# EAGLE board PANELIZED (EAGLE 5.12)
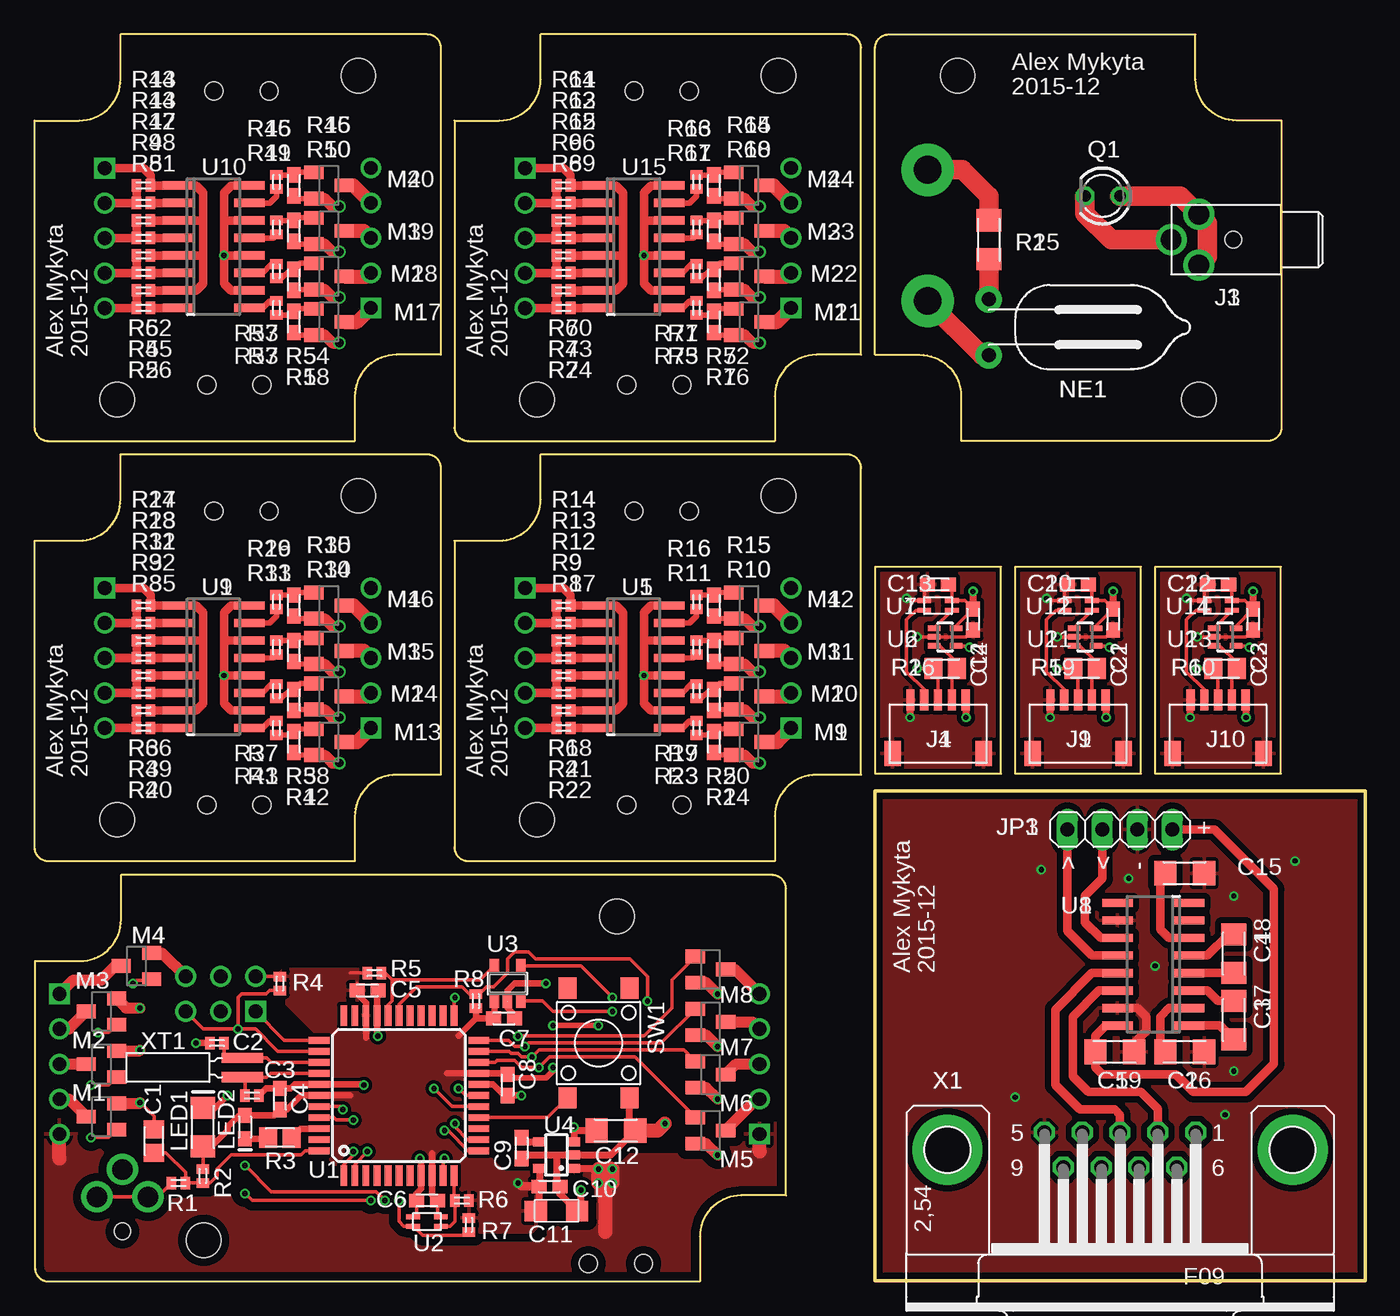
[diagram p0: board, top side]
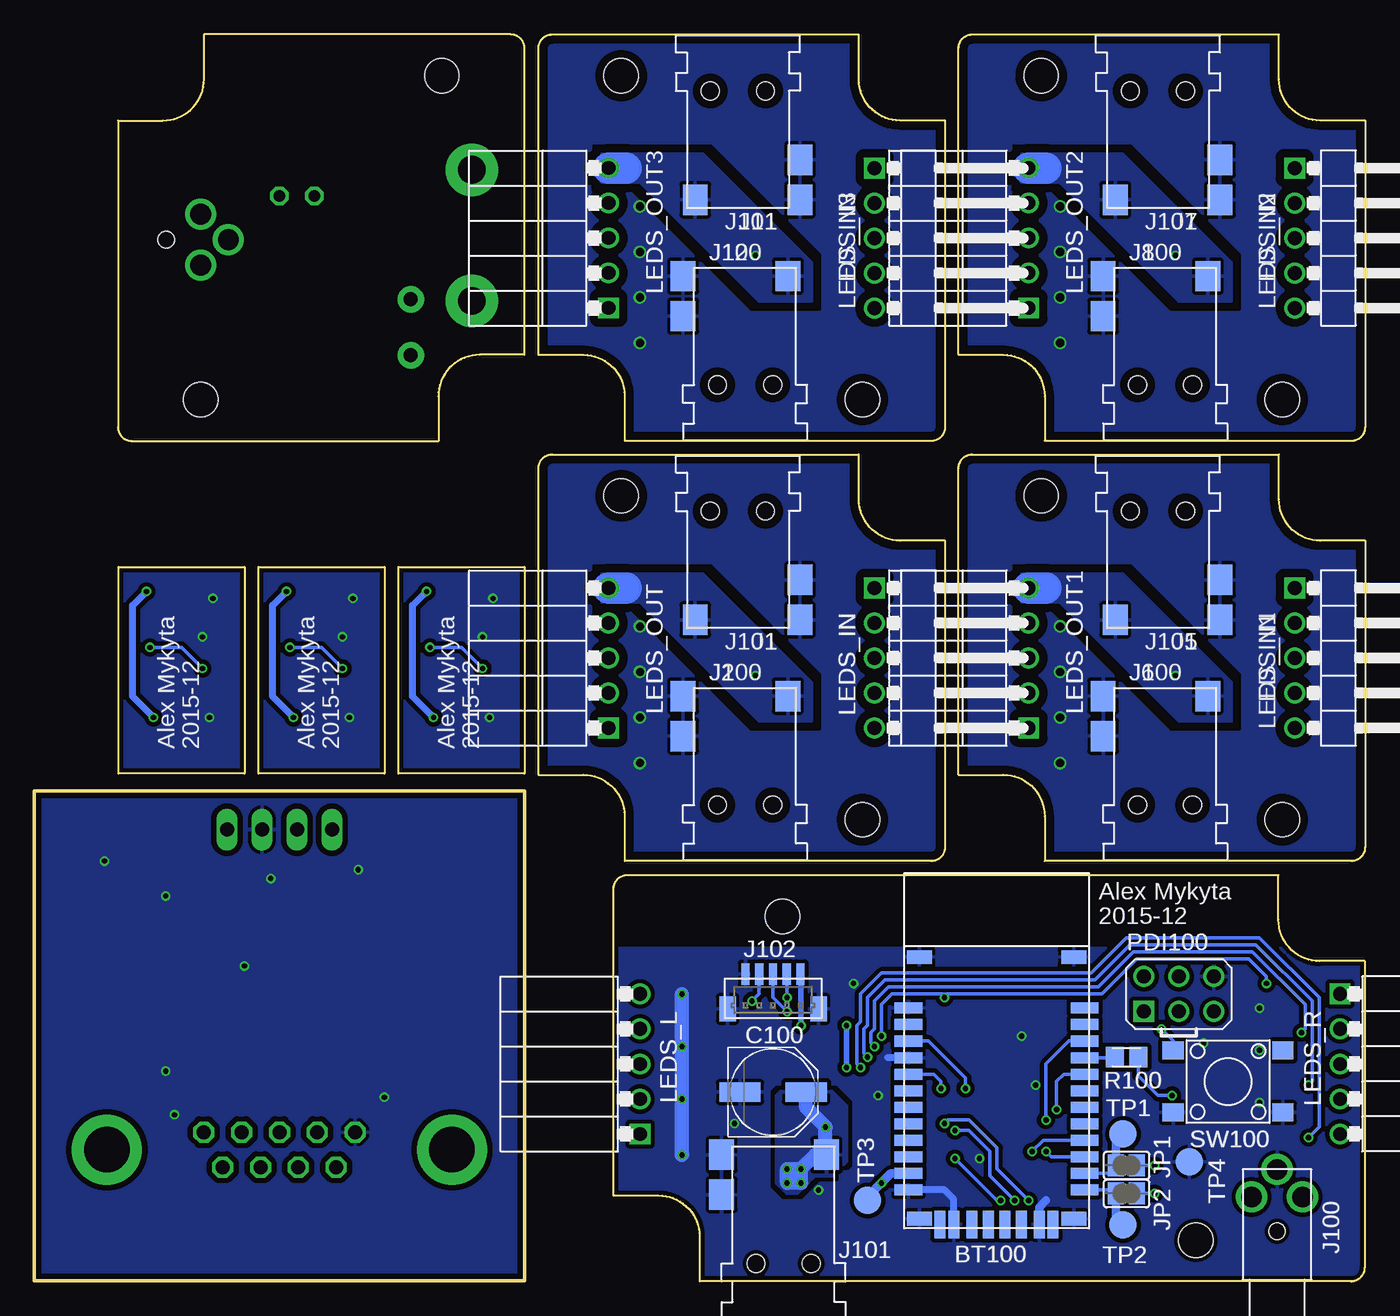
[diagram p1: board, bottom side, seen from below]

Size 96.56 x 90.5 mm. Coordinates in mm from the lower left corner, seen from the top.
Outline: 61,36.87 70.14,36.87 70.14,51.85 61,51.85 61,36.87
Outline: 61,35.6 96.56,35.6 96.56,0.04 61,0.04 61,35.6
Outline: 71.16,36.87 80.3,36.87 80.3,51.85 71.16,51.85 71.16,36.87
Outline: 81.32,36.87 90.46,36.87 90.46,51.85 81.32,51.85 81.32,36.87
Copper layers (1*16): Top 0.035mm / dielectric 1.5mm / Bottom 0.035mm
Design rules "MakerStudio": minimum track width 6mil, minimum drill 12mil, track to track 6mil, track to pad 6mil, pad to pad 6mil, via to via 6mil, smd to smd 0mil, copper to edge 10mil, drill to drill 10mil, minimum pad ring 10mil, minimum via ring 6mil, stop-mask expansion 2mil, vias tented up to drill 100mil, thermal gap 10mil

## Footprints (pad centres in the part's own frame; a part is rotated, then mirrored left to right if it is on the bottom)
RN42 = smd 2 x 0.8: 1 0.3,16; 2 0.3,14.8; 3 0.3,13.6; 4 0.3,12.4; 5 0.3,11.2; 6 0.3,10; 7 0.3,8.8; 8 0.3,7.6; 9 0.3,6.4; 10 0.3,5.2; 11 0.3,4; 12 0.3,2.8; 13 13.1,2.8; 14 13.1,4; 15 13.1,5.2; 16 13.1,6.4; 17 13.1,7.6; 18 13.1,8.8; 19 13.1,10; 20 13.1,11.2; 21 13.1,12.4; 22 13.1,13.6; 23 13.1,14.8; 24 13.1,16 | smd 0.8 x 2: 28 9.8,0.3; 29 3.6,0.3; 30 10.8,0.3; 31 8.5,0.3; 32 7.3,0.3; 33 6.1,0.3; 34 4.9,0.3; 35 2.6,0.3 | smd 1.8 x 1: S1 1.1,0.7; S2 12.3,0.7; S3 1.1,19.7; S4 12.3,19.7
0805 = smd 1.3 x 1.5: 1 -0.85,0; 2 0.85,0
0402 = smd 0.7 x 0.9: 1 -0.508,0; 2 0.508,0
0603 = smd 1.1 x 1: 1 -0.762,0; 2 0.762,0
KEMET-3216-18 = smd 1.6 x 1.5: + 1.5,0; - -1.5,0
1206 = smd 1.6 x 1.8: 1 -1.4,0; 2 1.4,0
PANASONIC_D = smd 3 x 1.4: + 2.4,0; - -2.4,0
PJ1-021-SMD = smd 2.2 x 1.8: 1 7.9,-2.6; 2 5,5; 3 7.9,5 | hole 1.3: 0,2.5; 0,-1.5
MJ1-2503A = drill 1.5 round: 1 2,0; 2 0,-1.85; 3 0,1.85 | hole 1.2: -2.5,0
JST_SR-5-RA = smd 0.6 x 1.55: 1 2,4.575; 2 1,4.575; 3 0,4.575; 4 -1,4.575; 5 -2,4.575 | smd 1.2 x 1.8: M1 3.3,0.7; M2 -3.3,0.7
JST_SR-5 = smd 0.6 x 1.55: 1 2,3.225; 2 1,3.225; 3 0,3.225; 4 -1,3.225; 5 -2,3.225 | smd 1.2 x 1.8: M1 3.3,0.7; M2 -3.3,0.7
SJ = smd 1.168 x 1.6: 1 -0.762,0; 2 0.762,0
1X04 = drill 1.016 long: 1 -3.81,0; 2 -1.27,0; 3 1.27,0; 4 3.81,0
1206' = smd 1.6 x 1.8: A -1.4,0; K 1.4,0
0603' = smd 1.1 x 1: A -0.85,0; K 0.85,0
1X05/90 = drill 1.016 square: 1 -5.08,-3.81 | drill 1.016 round: 2 -2.54,-3.81; 3 0,-3.81; 4 2.54,-3.81; 5 5.08,-3.81
1X05/90-F = drill 1 square: 1 -5.08,0 | drill 1 round: 2 -2.54,0; 3 0,0; 4 2.54,0; 5 5.08,0
SOT23 = smd 1 x 1.4: 1 -0.95,-1.1; 2 0.95,-1.1; 3 0,1.1
A1C = drill 1 pad 1.93 round: P$1 -2.032,-1.905; P$2 2.032,-1.905
2X03 = drill 1.016 square: 1 -2.54,-1.27 | drill 1.016 round: 2 -2.54,1.27; 3 0,-1.27; 4 0,1.27; 5 2.54,-1.27; 6 2.54,1.27
OPTO3MM = drill 0.813 octagon: C -1.27,0; E 1.27,0
TACT-6MM-SMT = smd 1.55 x 1.3: A1 -3.975,2.25; A2 3.975,2.25; B1 -3.975,-2.25; B2 3.975,-2.25
TP20R = smd 2 x 2: TP 0,0
TQFP44 = smd 1.5 x 0.5: 1 -5.8,4; 2 -5.8,3.2; 3 -5.8,2.4; 4 -5.8,1.6; 5 -5.8,0.8; 6 -5.8,0; 7 -5.8,-0.8; 8 -5.8,-1.6; 9 -5.8,-2.4; 10 -5.8,-3.2; 11 -5.8,-4; 23 5.8,-4; 24 5.8,-3.2; 25 5.8,-2.4; 26 5.8,-1.6; 27 5.8,-0.8; 28 5.8,0; 29 5.8,0.8; 30 5.8,1.6; 31 5.8,2.4; 32 5.8,3.2; 33 5.8,4 | smd 0.5 x 1.5: 12 -4,-5.8; 13 -3.2,-5.8; 14 -2.4,-5.8; 15 -1.6,-5.8; 16 -0.8,-5.8; 17 0,-5.8; 18 0.8,-5.8; 19 1.6,-5.8; 20 2.4,-5.8; 21 3.2,-5.8; 22 4,-5.8; 34 4,5.8; 35 3.2,5.8; 36 2.4,5.8; 37 1.6,5.8; 38 0.8,5.8; 39 0,5.8; 40 -0.8,5.8; 41 -1.6,5.8; 42 -2.4,5.8; 43 -3.2,5.8; 44 -4,5.8
VEML6040 = smd 1 x 0.35: 1 -1,0.35; 2 -1,-0.35; 3 1,-0.35; 4 1,0.35
SOT23-5 = smd 0.69 x 0.99: 1 -0.95,-1.29; 2 0,-1.29; 3 0.95,-1.29; 4 0.95,1.3; 5 -0.95,1.3
SSOP5-P-0.95 = smd 0.65 x 1: 1 -0.95,-1.2; 2 0,-1.2; 3 0.95,-1.2; 4 0.95,1.2; 5 -0.95,1.2
SOIC16N = smd 0.6 x 2.2: 1 -4.445,-2.6; 2 -3.175,-2.6; 3 -1.905,-2.6; 4 -0.635,-2.6; 5 0.635,-2.6; 6 1.905,-2.6; 7 3.175,-2.6; 8 4.445,-2.6; 9 4.445,2.6; 10 3.175,2.6; 11 1.905,2.6; 12 0.635,2.6; 13 -0.635,2.6; 14 -1.905,2.6; 15 -3.175,2.6; 16 -4.445,2.6
SOT353 = smd 0.4 x 0.9: 1 -0.65,-0.8; 2 0,-0.8; 3 0.65,-0.8; 4 0.65,0.8; 5 -0.65,0.8
1551NFL = hole 2.5: 6,26.5; 23.5,3
1551JFL = hole 2.5: 12.25,26.5; 42.25,3
F09HP = drill 1.016 octagon: 1 -5.486,-1.27; 2 -2.743,-1.27; 3 0,-1.27; 4 2.743,-1.27; 5 5.486,-1.27; 6 -4.115,1.27; 7 -1.372,1.27; 8 1.372,1.27; 9 4.115,1.27 | drill 3.302 pad 5.08 round: G1 -12.522,0; G2 12.522,0
2.1X6MM = smd 3 x 0.75: 1 5.4,0.7; 2 5.4,-0.7

## Placement (x,y rotation side)
BT100  RN42  [RN42]  33.44,3.85 0 bottom
C1  4.7u  [0805]  8.67,10.2 90 top
C2  10p  [0402]  13.24,17.31 180 top
C3  10p  [0402]  15.78,13.5 0 top
C4  0.1u  [0603]  17.82,13.24 90 top
C5  0.1u  [0603]  24.17,21.12 0 top
C6  0.1u  [0603]  28.48,5.88 180 top
C7  1u  [0603]  34.07,19.09 0 top
C8  0.1u  [0603]  34.33,14.26 270 top
C9  0.01u  [0603]  35.34,9.69 270 top
C10  0.1u  [0603]  37.37,6.89 0 top
C11  10u  [KEMET-3216-18]  37.88,5.12 180 top
C12  0.1u  [1206]  42.2,10.96 0 top
C13  0.1u  [0603]  65.57,50.58 180 top
C14  1u  [0603]  68.11,48.04 270 top
C15  0.1u  [1206]  83.47,29.63 0 top
C16  0.1u  [1206]  83.47,16.67 0 top
C17  0.1u  [1206]  87.03,18.96 90 top
C18  0.1u  [1206]  87.03,23.79 90 top
C19  0.1u  [1206]  78.39,16.67 0 top
C20  0.1u  [0603]  75.73,50.58 180 top
C21  1u  [0603]  78.27,48.04 270 top
C22  0.1u  [0603]  85.89,50.58 180 top
C23  1u  [0603]  88.43,48.04 270 top
C100  22u  [PANASONIC_D]  42.96,13.75 0 bottom
J1  EIAJ-03  [PJ1-021-SMD]  46.01,55.92 270 bottom
J2  EIAJ-03  [PJ1-021-SMD]  44.49,34.58 90 bottom
J3  MJ1-2503A  [MJ1-2503A]  84.49,75.6 180 top
J4  JST_SR-5-RA  [JST_SR-5-RA]  65.57,37.63 0 top
J5  EIAJ-03  [PJ1-021-SMD]  15.53,55.92 270 bottom
J6  EIAJ-03  [PJ1-021-SMD]  14.01,34.58 90 bottom
J7  EIAJ-03  [PJ1-021-SMD]  15.53,86.4 270 bottom
J8  EIAJ-03  [PJ1-021-SMD]  14.01,65.06 90 bottom
J9  JST_SR-5-RA  [JST_SR-5-RA]  75.73,37.63 0 top
J10  JST_SR-5-RA  [JST_SR-5-RA]  85.89,37.63 0 top
J11  EIAJ-03  [PJ1-021-SMD]  46.01,86.4 270 bottom
J12  EIAJ-03  [PJ1-021-SMD]  44.49,65.06 90 bottom
J100  MJ1-2503A  [MJ1-2503A]  6.39,6.13 90 bottom
J101  EIAJ-03  [PJ1-021-SMD]  41.69,1.31 90 bottom
J102  JST_SR-5  [JST_SR-5]  42.96,19.09 0 bottom
JP1  [SJ]  17.31,8.42 0 bottom
JP2  [SJ]  17.31,6.39 0 bottom
JP3  [1X04]  78.78,32.8 0 top
LED1  Green  [1206']  12.23,11.21 90 top
LED2  Red  [0603']  15.28,11.21 270 top
LEDS_IN  PINHD-1X5/90  [1X05/90]  31.79,45.25 270 bottom
LEDS_IN1  PINHD-1X5/90  [1X05/90]  1.31,45.25 270 bottom
LEDS_IN2  PINHD-1X5/90  [1X05/90]  1.31,75.73 270 bottom
LEDS_IN3  PINHD-1X5/90  [1X05/90]  31.79,75.73 270 bottom
LEDS_L  PINHD-1X5/90F  [1X05/90-F]  52.61,15.78 90 bottom
LEDS_OUT  PINHD-1X5/90F  [1X05/90-F]  54.9,45.25 90 bottom
LEDS_OUT1  PINHD-1X5/90F  [1X05/90-F]  24.42,45.25 90 bottom
LEDS_OUT2  PINHD-1X5/90F  [1X05/90-F]  24.42,75.73 90 bottom
LEDS_OUT3  PINHD-1X5/90F  [1X05/90-F]  54.9,75.73 90 bottom
LEDS_R  PINHD-1X5/90F  [1X05/90-F]  1.81,15.78 270 bottom
M1  FDN337N  [SOT23]  4.86,11.97 90 top
M2  FDN337N  [SOT23]  4.86,15.78 90 top
M3  FDN337N  [SOT23]  4.86,19.59 90 top
M4  FDN337N  [SOT23]  7.4,22.9 90 top
M5  FDN337N  [SOT23]  49.06,10.96 270 top
M6  FDN337N  [SOT23]  49.06,15.02 270 top
M7  FDN337N  [SOT23]  49.06,18.83 270 top
M8  FDN337N  [SOT23]  49.06,22.64 270 top
M9  FDN337N  [SOT23]  51.85,39.15 270 top
M10  FDN337N  [SOT23]  51.85,42.45 270 top
M11  FDN337N  [SOT23]  51.85,45.76 270 top
M12  FDN337N  [SOT23]  51.85,49.06 270 top
M13  FDN337N  [SOT23]  21.37,39.15 270 top
M14  FDN337N  [SOT23]  21.37,42.45 270 top
M15  FDN337N  [SOT23]  21.37,45.76 270 top
M16  FDN337N  [SOT23]  21.37,49.06 270 top
M17  FDN337N  [SOT23]  21.37,69.63 270 top
M18  FDN337N  [SOT23]  21.37,72.93 270 top
M19  FDN337N  [SOT23]  21.37,76.24 270 top
M20  FDN337N  [SOT23]  21.37,79.54 270 top
M21  FDN337N  [SOT23]  51.85,69.63 270 top
M22  FDN337N  [SOT23]  51.85,72.93 270 top
M23  FDN337N  [SOT23]  51.85,76.24 270 top
M24  FDN337N  [SOT23]  51.85,79.54 270 top
NE1  A1C  [A1C]  71.16,69.25 270 top
PDI100  ATMEL_PDI  [2X03]  13.5,20.86 0 bottom
Q1  TEPT4400  [OPTO3MM]  77.51,78.78 180 top
R1  1k  [0402]  10.45,7.15 180 top
R2  10k  [0402]  12.23,7.66 90 top
R3  330  [0805]  17.82,10.45 180 top
R4  10k  [0402]  17.82,21.63 90 top
R5  2.2k  [0402]  24.67,22.39 180 top
R6  2.2k  [0402]  31.02,5.88 0 top
R7  2.2k  [0402]  31.53,4.1 90 top
R8  2.2k  [0402]  32.04,20.36 270 top
R9  1k  [0402]  38.39,45.25 0 top
R10  4.7k  [0603]  49.31,45.76 90 top
R11  10k  [0402]  48.04,46.01 270 top
R12  10k  [0402]  38.39,46.52 0 top
R13  1k  [0402]  38.39,47.79 0 top
R14  10k  [0402]  38.39,49.06 0 top
R15  4.7k  [0603]  49.31,49.06 90 top
R16  10k  [0402]  48.04,49.31 270 top
R17  10k  [0402]  38.39,43.98 0 top
R18  1k  [0402]  38.39,42.71 0 top
R19  10k  [0402]  48.04,42.84 90 top
R20  4.7k  [0603]  49.31,42.2 90 top
R21  10k  [0402]  38.39,41.44 0 top
R22  1k  [0402]  38.39,40.17 0 top
R23  10k  [0402]  48.04,40.17 90 top
R24  4.7k  [0603]  49.31,39.15 90 top
R25  47k  [1206]  69.25,75.6 270 top
R26  100  [0805]  66.08,44.49 0 top
R27  10k  [0402]  7.91,49.06 0 top
R28  1k  [0402]  7.91,47.79 0 top
R29  10k  [0402]  17.56,49.31 270 top
R30  4.7k  [0603]  18.83,49.06 90 top
R31  10k  [0402]  7.91,46.52 0 top
R32  1k  [0402]  7.91,45.25 0 top
R33  10k  [0402]  17.56,46.01 270 top
R34  4.7k  [0603]  18.83,45.76 90 top
R35  10k  [0402]  7.91,43.98 0 top
R36  1k  [0402]  7.91,42.71 0 top
R37  10k  [0402]  17.56,42.84 90 top
R38  4.7k  [0603]  18.83,42.2 90 top
R39  10k  [0402]  7.91,41.44 0 top
R40  1k  [0402]  7.91,40.17 0 top
R41  10k  [0402]  17.56,40.17 90 top
R42  4.7k  [0603]  18.83,39.15 90 top
R43  10k  [0402]  7.91,79.54 0 top
R44  1k  [0402]  7.91,78.27 0 top
R45  10k  [0402]  17.56,79.79 270 top
R46  4.7k  [0603]  18.83,79.54 90 top
R47  10k  [0402]  7.91,77 0 top
R48  1k  [0402]  7.91,75.73 0 top
R49  10k  [0402]  17.56,76.49 270 top
R50  4.7k  [0603]  18.83,76.24 90 top
R51  10k  [0402]  7.91,74.46 0 top
R52  1k  [0402]  7.91,73.19 0 top
R53  10k  [0402]  17.56,73.31 90 top
R54  4.7k  [0603]  18.83,72.68 90 top
R55  10k  [0402]  7.91,71.92 0 top
R56  1k  [0402]  7.91,70.65 0 top
R57  10k  [0402]  17.56,70.65 90 top
R58  4.7k  [0603]  18.83,69.63 90 top
R59  100  [0805]  76.24,44.49 0 top
R60  100  [0805]  86.4,44.49 0 top
R61  10k  [0402]  38.39,79.54 0 top
R62  1k  [0402]  38.39,78.27 0 top
R63  10k  [0402]  48.04,79.79 270 top
R64  4.7k  [0603]  49.31,79.54 90 top
R65  10k  [0402]  38.39,77 0 top
R66  1k  [0402]  38.39,75.73 0 top
R67  10k  [0402]  48.04,76.49 270 top
R68  4.7k  [0603]  49.31,76.24 90 top
R69  10k  [0402]  38.39,74.46 0 top
R70  1k  [0402]  38.39,73.19 0 top
R71  10k  [0402]  48.04,73.31 90 top
R72  4.7k  [0603]  49.31,72.68 90 top
R73  10k  [0402]  38.39,71.92 0 top
R74  1k  [0402]  38.39,70.65 0 top
R75  10k  [0402]  48.04,70.65 90 top
R76  4.7k  [0603]  49.31,69.63 90 top
R100  330  [0805]  17.31,16.29 0 bottom
SW1  TACTILE-6MM-SMT  [TACT-6MM-SMT]  40.93,17.31 270 top
SW100  TACTILE-6MM-SMT  [TACT-6MM-SMT]  9.94,14.51 180 bottom
TP1  TPTP20R  [TP20R]  17.56,10.7 0 bottom
TP2  TPTP20R  [TP20R]  17.56,4.1 0 bottom
TP3  TPTP20R  [TP20R]  36.1,5.88 0 bottom
TP4  TPTP20R  [TP20R]  12.74,8.67 0 bottom
U1  ATXMEGA128D4  [TQFP44]  26.45,13.5 90 top
U2  VEML6040  [VEML6040]  28.48,4.35 0 top
U3  FIN1001M5  [SOT23-5]  34.33,21.63 0 top
U4  TAR5SB33  [SSOP5-P-0.95]  37.88,9.18 90 top
U5  TLP293-4  [SOIC16N]  43.47,44.61 270 top
U6  NCX2200GW  [SOT353]  66.08,46.77 270 top
U7  VEML6040  [VEML6040]  65.57,49.06 0 top
U8  MAX3232ECD  [SOIC16N]  81.19,23.02 90 top
U9  TLP293-4  [SOIC16N]  12.99,44.61 270 top
U10  TLP293-4  [SOIC16N]  12.99,75.09 270 top
U11  NCX2200GW  [SOT353]  76.24,46.77 270 top
U12  VEML6040  [VEML6040]  75.73,49.06 0 top
U13  NCX2200GW  [SOT353]  86.4,46.77 270 top
U14  VEML6040  [VEML6040]  85.89,49.06 0 top
U15  TLP293-4  [SOIC16N]  43.47,75.09 270 top
U$1  [1551NFL]  61,61 0 top
U$2  [1551NFL]  29.5,30.52 0 bottom
U$3  [1551NFL]  29.5,61 0 bottom
U$4  [1551NFL]  59.98,61 0 bottom
U$12  [1551NFL]  59.98,30.52 0 bottom
U$100  [1551JFL]  0.04,29.5 180 bottom
X1  [F09HP]  78.78,9.56 180 top
XT1  32.768k  [2.1X6MM]  9.69,15.53 0 top

## Library data of the parts
BT100 = aim-rf
C1-C23 C100 JP1 JP2 R1-R76 R100 = aim-passives
J1-J12 J100-J102 = aim-connectors
JP3 LEDS_IN LEDS_IN1-LEDS_IN3 LEDS_L LEDS_OUT LEDS_OUT1-LEDS_OUT3 LEDS_R = aim-headers
LED1 LED2 = aim-diodes
M1-M24 Q1 U5 U9 U10 U15 = aim-transistor
NE1 = aim-lamp
PDI100 U1 = aim-atmel
SW1 SW100 = aim-switch
TP1-TP4 = testpad
U2 U7 U12 U14 = aim-sensors
U3 U8 = aim-digital
U4 = aim-power; VOLT: 3.3
U6 U11 U13 = aim-analog
U$1-U$4 U$12 U$100 = hammond_enclosures
X1 = con-subd; OC_FARNELL: unknown; OC_NEWARK: unknown
XT1 = aim-crystals

## Nets
3V1: C13.1 C14.1 J4.1 U6.5 U7.4
3V2: C19.1 JP3.4 U8.16
3V3: BT100.11 C4.1 C5.1 C6.1 C7.1 C8.1 C10.1 C11.+ J102.1 LED1.A LED2.A PDI100.2 R2.2 R4.2 R5.2 R6.2 R7.2 R8.2 TP3.TP U1.9 U1.19 U1.31 U1.39 U2.4 U3.1 U4.5
3V4: C20.1 C21.1 J9.1 U11.5 U12.4
3V5: C22.1 C23.1 J10.1 U13.5 U14.4
12V: C12.1 C100.+ J101.1 LEDS_L.1 LEDS_R.5 U4.1 U4.3
12V1: J1.1 J2.1 LEDS_OUT.5 U5.10 U5.12 U5.14 U5.16
12V2: J5.1 J6.1 LEDS_OUT1.5 U9.10 U9.12 U9.14 U9.16
12V3: J7.1 J8.1 LEDS_OUT2.5 U10.10 U10.12 U10.14 U10.16
12V4: J11.1 J12.1 LEDS_OUT3.5 U15.10 U15.12 U15.14 U15.16
12V_IN: LEDS_IN.1 R12.2 R14.2 R17.2 R21.2 U5.1 U5.3 U5.5 U5.7
12V_IN1: LEDS_IN1.1 R27.2 R31.2 R35.2 R39.2 U9.1 U9.3 U9.5 U9.7
12V_IN2: LEDS_IN2.1 R43.2 R47.2 R51.2 R55.2 U10.1 U10.3 U10.5 U10.7
12V_IN3: LEDS_IN3.1 R61.2 R65.2 R69.2 R73.2 U15.1 U15.3 U15.5 U15.7
B_IN: LEDS_IN.4 R17.1 R18.1
B_IN1: LEDS_IN1.4 R35.1 R36.1
B_IN2: LEDS_IN2.4 R51.1 R52.1
B_IN3: LEDS_IN3.4 R69.1 R70.1
BT_!RESET: BT100.5 U1.17
BT_CTS: BT100.15 U1.1
BT_GPIO3: BT100.20 U1.40
BT_GPIO4: BT100.22 U1.41
BT_GPIO6: BT100.3 U1.16
BT_MCU_RX: JP1.2 U1.12
BT_MCU_TX: JP2.2 U1.13
BT_RTS: BT100.16 U1.2
BT_RX: BT100.14 JP1.1 TP1.TP
BT_TX: BT100.13 JP2.1 TP2.TP
G_IN: LEDS_IN.3 R9.1 R12.1
G_IN1: LEDS_IN1.3 R31.1 R32.1
G_IN2: LEDS_IN2.3 R47.1 R48.1
G_IN3: LEDS_IN3.3 R65.1 R66.1
GND: BT100.1 BT100.4 BT100.12 BT100.28 BT100.29 BT100.S1 BT100.S2 BT100.S3 BT100.S4 C1.2 C2.2 C3.2 C4.2 C5.2 C6.2 C7.2 C8.2 C9.2 C10.2 C11.- C12.2 C100.- J100.1 J101.2 J101.3 J102.5 J102.M1 J102.M2 M1.2 M2.2 M3.2 M4.2 M5.2 M6.2 M7.2 M8.2 PDI100.6 SW1.A2 SW100.A1 SW100.A2 TP4.TP U1.8 U1.18 U1.30 U1.38 U2.1 U3.2 U4.2
GND1: J1.2 J1.3 J2.2 J2.3 M9.2 M10.2 M11.2 M12.2 R10.1 R15.1 R20.1 R24.1
GND2: J3.1 Q1.E
GND3: C13.2 C14.2 J4.5 J4.M1 J4.M2 U6.2 U7.1
GND4: C15.2 C16.2 C19.2 JP3.3 U8.10 U8.15 X1.5
GND5: J5.2 J5.3 J6.2 J6.3 M13.2 M14.2 M15.2 M16.2 R30.1 R34.1 R38.1 R42.1
GND6: J7.2 J7.3 J8.2 J8.3 M17.2 M18.2 M19.2 M20.2 R46.1 R50.1 R54.1 R58.1
GND7: C20.2 C21.2 J9.5 J9.M1 J9.M2 U11.2 U12.1
GND8: C22.2 C23.2 J10.5 J10.M1 J10.M2 U13.2 U14.1
GND9: J11.2 J11.3 J12.2 J12.3 M21.2 M22.2 M23.2 M24.2 R64.1 R68.1 R72.1 R76.1
I2C0_SCL: R6.1 U1.11 U2.3
I2C0_SDA: R7.1 U1.10 U2.2
I2C1_SCL: R5.1 U1.29 U3.5
I2C1_SDA: J102.4 R8.1 U1.28
N$1: LEDS_OUT.1 M9.3
N$2: LEDS_L.5 M8.3
N$3: LEDS_L.4 M7.3
N$4: LEDS_L.3 M6.3
N$5: LEDS_L.2 M5.3
N$6: LEDS_OUT.2 M10.3
N$7: BT100.21 R100.1
N$8: LED1.K R100.2
N$9: LED2.K R3.2
N$10: C9.1 U4.4
N$11: J100.2 J100.3 R1.2
N$12: PDI100.1 U1.34
N$13: PDI100.5 R4.1 SW100.B2 U1.35
N$14: C3.1 U1.37 XT1.2
N$15: C2.1 U1.36 XT1.1
N$16: LEDS_R.1 M4.3
N$17: LEDS_R.2 M3.3
N$18: LEDS_R.3 M2.3
N$19: LEDS_R.4 M1.3
N$20: SW1.B2 U1.15
N$21: LEDS_OUT.3 M11.3
N$22: LEDS_OUT.4 M12.3
N$23: R13.2 U5.2
N$24: R16.2 U5.15
N$25: R9.2 U5.4
N$26: R11.2 U5.13
N$27: R18.2 U5.6
N$28: R19.2 U5.11
N$29: R22.2 U5.8
N$30: R23.2 U5.9
N$31: J3.2 J3.3 Q1.C
N$32: NE1.P$1 R25.2
N$33: C17.2 U8.3
N$34: C17.1 U8.1
N$35: C18.1 U8.4
N$36: C18.2 U8.5
N$37: C15.1 U8.6
N$38: C16.1 U8.2
N$39: LEDS_OUT1.1 M13.3
N$40: LEDS_OUT1.2 M14.3
N$41: LEDS_OUT1.3 M15.3
N$42: LEDS_OUT1.4 M16.3
N$43: R28.2 U9.2
N$44: R29.2 U9.15
N$45: R32.2 U9.4
N$46: R33.2 U9.13
N$47: R36.2 U9.6
N$48: R37.2 U9.11
N$49: R40.2 U9.8
N$50: R41.2 U9.9
N$51: LEDS_OUT2.1 M17.3
N$52: LEDS_OUT2.2 M18.3
N$53: LEDS_OUT2.3 M19.3
N$54: LEDS_OUT2.4 M20.3
N$55: R44.2 U10.2
N$56: R45.2 U10.15
N$57: R48.2 U10.4
N$58: R49.2 U10.13
N$59: R52.2 U10.6
N$60: R53.2 U10.11
N$61: R56.2 U10.8
N$62: R57.2 U10.9
N$63: LEDS_OUT3.1 M21.3
N$64: LEDS_OUT3.2 M22.3
N$65: LEDS_OUT3.3 M23.3
N$66: LEDS_OUT3.4 M24.3
N$67: R62.2 U15.2
N$68: R63.2 U15.15
N$69: R66.2 U15.4
N$70: R67.2 U15.13
N$71: R70.2 U15.6
N$72: R71.2 U15.11
N$73: R74.2 U15.8
N$74: R75.2 U15.9
PWM_B: M3.1 M7.1 U1.22
PWM_B1: M10.1 R19.1 R20.2
PWM_B2: M14.1 R37.1 R38.2
PWM_B3: M18.1 R53.1 R54.2
PWM_B4: M22.1 R71.1 R72.2
PWM_G: M2.1 M6.1 U1.21
PWM_G1: M11.1 R10.2 R11.1
PWM_G2: M15.1 R33.1 R34.2
PWM_G3: M19.1 R49.1 R50.2
PWM_G4: M23.1 R67.1 R68.2
PWM_R: M1.1 M5.1 U1.20
PWM_R1: M12.1 R15.2 R16.1
PWM_R2: M16.1 R29.1 R30.2
PWM_R3: M20.1 R45.1 R46.2
PWM_R4: M24.1 R63.1 R64.2
PWM_W: M4.1 M8.1 U1.23
PWM_W1: M9.1 R23.1 R24.2
PWM_W2: M13.1 R41.1 R42.2
PWM_W3: M17.1 R57.1 R58.2
PWM_W4: M21.1 R75.1 R76.2
PWR_SENSE: C1.1 R1.1 R2.1 U1.44
R_IN: LEDS_IN.2 R13.1 R14.1
R_IN1: LEDS_IN1.2 R27.1 R28.1
R_IN2: LEDS_IN2.2 R43.1 R44.1
R_IN3: LEDS_IN3.2 R61.1 R62.1
RED_LED: R3.1 U1.42
RS232_RX: U8.13 X1.3
RS232_TX: U8.14 X1.2
SCL: U6.1 U7.3
SCL1: U11.1 U12.3
SCL2: U13.1 U14.3
SCL_N: J102.3 U3.3
SCL_N1: J4.3 R26.1 U6.4
SCL_N2: J9.3 R59.1 U11.4
SCL_N3: J10.3 R60.1 U13.4
SCL_P: J102.2 U3.4
SCL_P1: J4.2 R26.2 U6.3
SCL_P2: J9.2 R59.2 U11.3
SCL_P3: J10.2 R60.2 U13.3
SDA: J4.4 U7.2
SDA1: J9.4 U12.2
SDA2: J10.4 U14.2
TTL_RX: JP3.1 U8.12
TTL_TX: JP3.2 U8.11
VAC_H: NE1.P$2
VAC_N: R25.1
W_IN: LEDS_IN.5 R21.1 R22.1
W_IN1: LEDS_IN1.5 R39.1 R40.1
W_IN2: LEDS_IN2.5 R55.1 R56.1
W_IN3: LEDS_IN3.5 R73.1 R74.1

## Tracks (layer width: path | path; a pad name or v marks a point on that pad's centre or on a via)
3V1  (via drill 0.38)
  Top 0.254: C13.1 66.57,50.34 U7.4 67.5,49.41 C14.1 66.88,47.57 U6.5 | J4.1 67.6,42.17
  Top 0.508: v68.11,50.07 C14.1 | 67.6,42.17 v67.6,40.93
  Bottom 0.508: v67.6,40.93 69.12,42.45 69.12,49.06 v68.11,50.07
3V2
  Top 0.61: U8.16 77.76,18.58 77,17.81 C19.1 77,15.53 77.51,15.02 82.84,15.02 84.11,13.75 87.92,13.75 89.95,15.78 89.95,28.48 85.63,32.8 JP3.4
3V3  (via drill 0.38)
  Top 0.254: PDI100.2 R4.2 | LED1.A R2.2 | 15.19,11.97 LED2.A | C6.1 29.25,4.94 U2.4 | C5.1 23.4,21.63 | R5.2 22.9,22.39
  Top 0.406: v37.63,18.58 v40.93,18.58 | v37.63,15.53 37.63,15.28 37.12,14.77 34.58,14.77 C8.1
  Top 0.457: C5.1 23.4,20.86 24.05,20.22 U1.31 24.05,17.68 | 22.9,13.5 U1.39 19.34,13.5 18.32,12.48 C4.1 17.4,12.06 LED2.A | 29.93,15.1 U1.19 34.25,15.1 C8.1 | 28.85,9.32 U1.9 28.85,6.27 C6.1 | LED1.A 12.86,9.81 14.01,10.96 14.01,11.21 14.77,11.97 15.19,11.97 | R8.2 32.04,19.09 | 32.04,19.09 30.77,17.82 | U3.1 33.38,19.15 C7.1 32.04,19.09
  Top 0.508: U4.5 36.68,6.96 C10.1 36.61,5.35 C11.+
  Top 0.61: v35.09,7.15 35.34,6.89 C10.1
  Bottom 0.254: 40.93,22.28 J102.1
  Bottom 0.406: v37.63,15.53 v37.63,18.58 | v40.93,18.58 40.93,22.28
  Bottom 0.61: BT100.11 34.39,7.85 v35.09,7.15 36.1,6.13 TP3.TP
  pour Top (isolate 0.254): 20.86,17.56 18.32,20.1 18.32,21.37 17.82,21.88 17.82,22.39 18.07,22.64 23.91,22.64 23.91,20.36 25.18,19.09 29.75,19.09 32.04,16.8 32.04,9.94 34.07,7.91 36.61,7.91 36.61,4.1 36.1,3.59 31.53,3.59 30.52,4.61 30.52,7.91 22.39,7.91 20.86,9.43
3V4  (via drill 0.38)
  Top 0.254: C20.1 76.73,50.34 U12.4 77.66,49.41 C21.1 77.04,47.57 U11.5 | J9.1 77.76,42.17
  Top 0.508: v78.27,50.07 C21.1 | 77.76,42.17 v77.76,40.93
  Bottom 0.508: v77.76,40.93 79.28,42.45 79.28,49.06 v78.27,50.07
3V5  (via drill 0.38)
  Top 0.254: C22.1 86.89,50.34 U14.4 87.82,49.41 C23.1 87.2,47.57 U13.5 | J10.1 87.92,42.17
  Top 0.508: v88.43,50.07 C23.1 | 87.92,42.17 v87.92,40.93
  Bottom 0.508: v87.92,40.93 89.44,42.45 89.44,49.06 v88.43,50.07
12V  (via drill 0.38)
  Top 0.254: 39.15,10.2 U4.3 | 39.15,8.16 U4.1 | 41.44,7.15 v40.93,7.15
  Top 0.508: C12.1 39.41,10.96 v39.15,11.21 39.15,10.2 | v40.93,8.16 39.15,8.16
  Top 1.016: v40.93,7.15 v40.93,8.16 v41.95,8.16 v41.95,7.15 41.44,7.15 41.44,3.59 | 52.61,9.43 LEDS_L.1 | 1.81,8.93 LEDS_R.5
  Bottom 0.254: J101.1 39.15,9.27
  Bottom 1.016: C100.+ 40.56,12.62 v39.15,11.21 39.15,9.27 | J101.1 39.89,9.21 v40.93,8.16 | v40.93,8.16 v41.95,8.16 v41.95,7.15 v40.93,7.15 v40.93,8.16
  pour Top (isolate 0.61, rank 2): 1.05,11.72 0.04,10.7 0.04,0.04 54.65,0.04 54.65,11.47 51.85,11.47 49.57,9.18 39.15,9.18 39.15,7.66 40.17,6.64 40.17,6.13 37.63,3.59 27.98,3.59 25.44,6.13 8.16,6.13 2.58,11.72
  pour Bottom (isolate 0.457): 39.15,14.26 37.63,12.74 37.63,8.67 38.64,7.66 39.91,7.66 41.18,6.39 41.95,6.39 42.71,7.15 42.71,13.5 41.95,14.26
12V1  (via drill 0.38)
  Top 0.61: U5.10 44.74,41.44 44.23,41.95 v44.23,43.98 | v44.23,43.98 U5.12 | v44.23,43.98 44.23,46.52 | 44.23,46.52 U5.14 | 44.23,46.52 44.23,48.55 44.74,49.06 U5.16
  Bottom 2.286: LEDS_OUT.5 53.63,50.33
  pour Bottom: 40.17,40.68 40.17,43.47 48.04,51.34 55.41,51.34 55.92,50.84 55.92,49.82 55.41,49.31 52.61,49.31 43.98,40.68
12V2  (via drill 0.38)
  Top 0.61: U9.10 14.26,41.44 13.75,41.95 v13.75,43.98 | v13.75,43.98 U9.12 | v13.75,43.98 13.75,46.52 | 13.75,46.52 U9.14 | 13.75,46.52 13.75,48.55 14.26,49.06 U9.16
  Bottom 2.286: LEDS_OUT1.5 23.15,50.33
  pour Bottom: 9.69,40.68 9.69,43.47 17.56,51.34 24.93,51.34 25.44,50.84 25.44,49.82 24.93,49.31 22.13,49.31 13.5,40.68
12V3  (via drill 0.38)
  Top 0.61: U10.10 14.26,71.92 13.75,72.43 v13.75,74.46 | v13.75,74.46 U10.12 | v13.75,74.46 13.75,77 | 13.75,77 U10.14 | 13.75,77 13.75,79.03 14.26,79.54 U10.16
  Bottom 2.286: LEDS_OUT2.5 23.15,80.81
  pour Bottom: 9.69,71.16 9.69,73.95 17.56,81.82 24.93,81.82 25.44,81.32 25.44,80.3 24.93,79.79 22.13,79.79 13.5,71.16
12V4  (via drill 0.38)
  Top 0.61: U15.10 44.74,71.92 44.23,72.43 v44.23,74.46 | v44.23,74.46 U15.12 | v44.23,74.46 44.23,77 | 44.23,77 U15.14 | 44.23,77 44.23,79.03 44.74,79.54 U15.16
  Bottom 2.286: LEDS_OUT3.5 53.63,80.81
  pour Bottom: 40.17,71.16 40.17,73.95 48.04,81.82 55.41,81.82 55.92,81.32 55.92,80.3 55.41,79.79 52.61,79.79 43.98,71.16
12V_IN
  Top 0.61: R12.2 U5.3 42.71,46.52 | R21.2 U5.7 42.2,41.44 42.71,41.95 42.71,43.98 | 42.71,43.98 42.71,46.52 | 42.71,43.98 U5.5 R17.2 | 42.71,46.52 42.71,48.55 42.2,49.06 U5.1 R14.2 38.9,49.82 38.39,50.33 LEDS_IN.1
12V_IN1
  Top 0.61: R31.2 U9.3 12.23,46.52 | R39.2 U9.7 11.72,41.44 12.23,41.95 12.23,43.98 | 12.23,43.98 12.23,46.52 | 12.23,43.98 U9.5 R35.2 | 12.23,46.52 12.23,48.55 11.72,49.06 U9.1 R27.2 8.42,49.82 7.91,50.33 LEDS_IN1.1
12V_IN2
  Top 0.61: R47.2 U10.3 12.23,77 | R55.2 U10.7 11.72,71.92 12.23,72.43 12.23,74.46 | 12.23,74.46 12.23,77 | 12.23,74.46 U10.5 R51.2 | 12.23,77 12.23,79.03 11.72,79.54 U10.1 R43.2 8.42,80.3 7.91,80.81 LEDS_IN2.1
12V_IN3
  Top 0.61: R65.2 U15.3 42.71,77 | R73.2 U15.7 42.2,71.92 42.71,72.43 42.71,74.46 | 42.71,74.46 42.71,77 | 42.71,74.46 U15.5 R69.2 | 42.71,77 42.71,79.03 42.2,79.54 U15.1 R61.2 38.9,80.3 38.39,80.81 LEDS_IN3.1
B_IN
  Top 0.61: LEDS_IN.4 R18.1 R17.1
B_IN1
  Top 0.61: LEDS_IN1.4 R36.1 R35.1
B_IN2
  Top 0.61: LEDS_IN2.4 R52.1 R51.1
B_IN3
  Top 0.61: LEDS_IN3.4 R70.1 R69.1
BT_!RESET  (via drill 0.38)
  Top 0.254: v30.77,14.01 31.28,13.5 U1.17
  Bottom 0.254: BT100.5 31.3,15.05 30.77,14.51 v30.77,14.01
BT_CTS  (via drill 0.38)
  Top 0.254: U1.1 22.45,8.48 23.15,9.18 v23.15,9.43
  Bottom 0.254: BT100.15 22.76,9.05 v23.15,9.43
BT_GPIO3  (via drill 0.38)
  Top 0.254: U1.40 22.17,12.7 v22.39,12.48
  Bottom 0.254: v22.39,12.48 22.39,14.51 21.86,15.05 BT100.20
BT_GPIO4  (via drill 0.38)
  Top 0.254: U1.41 21.7,11.9 21.88,11.72 v23.15,11.72
  Bottom 0.254: v23.15,11.72 23.15,15.78 21.49,17.45 BT100.22
BT_GPIO6  (via drill 0.38)
  Top 0.254: U1.16 30.3,12.7 v28.99,14.01
  Bottom 0.254: v28.99,14.01 28.99,14.77 31.67,17.45 BT100.3
BT_MCU_RX  (via drill 0.38)
  Top 0.254: U1.12 31.47,9.5 30.01,10.96 v29.75,10.96 | v15.28,8.42 17.18,6.51 24.8,6.51 v25.44,5.88
  Bottom 0.254: v29.75,10.96 28.74,10.96 27.21,9.43 27.21,7.66 v25.44,5.88 | v15.28,8.42 JP1.2
BT_MCU_TX  (via drill 0.38)
  Top 0.254: U1.13 31.43,10.3 30.52,11.21 v30.52,11.47 | v15.28,6.39 15.78,5.88 v24.42,5.88
  Bottom 0.254: v30.52,11.47 30.26,11.72 28.74,11.72 26.71,9.69 26.71,8.16 v24.42,5.88 | JP2.2 v15.28,6.39
BT_RTS  (via drill 0.38)
  Top 0.254: U1.2 23.25,8.52 v24.17,9.43
  Bottom 0.254: BT100.16 23.35,10.25 v24.17,9.43
BT_RX
  Bottom 0.254: BT100.14 18.64,7.85 JP1.1
  Bottom 0.61: JP1.1 18.07,10.2 TP1.TP
BT_TX
  Bottom 0.254: BT100.13 18.33,6.65 JP2.1
  Bottom 0.61: JP2.1 18.07,4.61 TP2.TP
G_IN
  Top 0.61: LEDS_IN.3 R9.1 R12.1
G_IN1
  Top 0.61: LEDS_IN1.3 R32.1 R31.1
G_IN2
  Top 0.61: LEDS_IN2.3 R48.1 R47.1
G_IN3
  Top 0.61: LEDS_IN3.3 R66.1 R65.1
GND  (via drill 0.38)
  Top 0.254: C1.2 8.67,11.97 v7.66,12.99 | C6.2 27.72,4.94 U2.1 | 23.87,14.3 23.91,14.3 v23.91,14.26
  Top 0.457: C3.2 16.8,14.01 C4.2 18.58,14.01 18.87,14.3 U1.38 23.87,14.3 | C5.2 24.85,21.04 U1.30 24.85,17.89 v24.93,17.82 | v11.72,17.31 C2.2 | v27.98,8.93 28.05,8.85 U1.8 28.05,6.72 27.72,6.39 C6.2 | U1.18 33.27,14.3 34.07,13.5 C8.2 v35.34,13.5 | v37.12,21.63 34.83,21.63 34.33,21.12 U3.2 34.33,19.85 34.83,19.34 C7.2
  Top 0.508: C9.2 35.6,9.18 37.88,9.18 | 37.88,9.18 U4.2 41.82,9.18 C12.2 43.18,11.38 SW1.A2 | 37.88,9.18 37.88,7.15 C10.2 38.14,6.36 C11.- 39.66,5.39 v39.66,6.64
  Top 0.813: M8.2 48.74,21.69 v49.57,20.86 | M7.2 48.74,17.88 v49.57,17.05 | M6.2 48.74,14.07 v49.57,13.24 | M5.2 48.74,10.01 v49.57,9.18 | M3.2 6.66,19.85 v7.66,19.85 | v7.66,12.99 7.59,12.92 M1.2 | v7.66,16.8 7.59,16.73 M2.2 | PDI100.6 9.25,23.85 M4.2
  Top 1.016: C12.2 45.25,10.96 v45.76,11.47
  Bottom 0.508: BT100.29 29.84,5.96 30.52,6.64 BT100.12 | BT100.4 34.63,16.25
  Bottom 0.61: BT100.28 23.64,5.39 23.15,5.88
  Bottom 1.016: v49.57,20.86 v49.57,17.05 v49.57,13.24 v49.57,9.18 49.54,9.21
  pour Bottom (isolate 0.305, rank 2): 0.04,24.17 54.65,24.17 54.65,0.04 0.04,0.04
GND1  (via drill 0.6)
  Top 0.406: M11.2 49.5,44.81 R10.1 | M12.2 49.5,48.11 R15.1 | M10.2 49.38,41.5 R20.1 | M9.2 49.5,38.2 R24.1
  Top 0.813: M11.2 51.53,44.81 52.11,44.23 v52.61,44.23 | M12.2 51.53,48.11 52.11,47.53 v52.61,47.53 | M10.2 51.53,41.5 52.11,40.93 v52.61,40.93 | M9.2 51.53,38.2 52.11,37.63 v52.61,37.63
  pour Bottom (isolate 0.61, rank 2): 30.52,59.98 59.98,59.98 59.98,30.52 30.52,30.52
GND2
  Top 1.422: J3.1 78.14,75.6 76.24,77.51 Q1.E
GND3  (via drill 0.38)
  Top 0.254: C13.2 64.57,50.34 U7.1 63.44,49.41 v63.28,49.57 | C14.2 67.6,46.77 U6.2 v64.04,46.77
  Top 0.508: J4.5 63.54,42.17 v63.54,40.93
  pour Bottom (isolate 0.305): 61,51.85 70.14,51.85 70.14,36.87 61,36.87
  pour Top (isolate 0.305): 61,51.85 70.14,51.85 70.14,36.87 61,36.87
GND4  (via drill 0.38)
  Top 0.61: U8.15 80.05,19.85 80.68,19.21 80.68,18.2 79.92,17.44 79.92,16.8 C19.2
  other vias: 79.41,29.25 73.06,29.88 87.03,27.98 91.48,30.52 81.32,22.9 87.03,15.28 86.4,12.1 71.16,13.37
  pour Top (isolate 0.457): 61,35.6 96.56,35.6 96.56,0.04 61,0.04
  pour Bottom (isolate 0.406): 61,35.6 96.56,35.6 96.56,0.04 61,0.04
GND5  (via drill 0.6)
  Top 0.406: M15.2 19.02,44.81 R34.1 | M16.2 19.02,48.11 R30.1 | M14.2 18.9,41.5 R38.1 | M13.2 19.02,38.2 R42.1
  Top 0.813: M15.2 21.05,44.81 21.63,44.23 v22.13,44.23 | M16.2 21.05,48.11 21.63,47.53 v22.13,47.53 | M14.2 21.05,41.5 21.63,40.93 v22.13,40.93 | M13.2 21.05,38.2 21.63,37.63 v22.13,37.63
  pour Bottom (isolate 0.61, rank 2): 0.04,59.98 29.5,59.98 29.5,30.52 0.04,30.52
GND6  (via drill 0.6)
  Top 0.406: M19.2 19.02,75.29 R50.1 | M20.2 19.02,78.59 R46.1 | M18.2 18.9,71.98 R54.1 | M17.2 19.02,68.68 R58.1
  Top 0.813: M19.2 21.05,75.29 21.63,74.71 v22.13,74.71 | M20.2 21.05,78.59 21.63,78.01 v22.13,78.01 | M18.2 21.05,71.98 21.63,71.41 v22.13,71.41 | M17.2 21.05,68.68 21.63,68.11 v22.13,68.11
  pour Bottom (isolate 0.61, rank 2): 0.04,90.46 29.5,90.46 29.5,61 0.04,61
GND7  (via drill 0.38)
  Top 0.254: C20.2 74.73,50.34 U12.1 73.6,49.41 v73.44,49.57 | C21.2 77.76,46.77 U11.2 v74.2,46.77
  Top 0.508: J9.5 73.7,42.17 v73.7,40.93
  pour Bottom (isolate 0.305): 71.16,51.85 80.3,51.85 80.3,36.87 71.16,36.87
  pour Top (isolate 0.305): 71.16,51.85 80.3,51.85 80.3,36.87 71.16,36.87
GND8  (via drill 0.38)
  Top 0.254: C22.2 84.89,50.34 U14.1 83.76,49.41 v83.6,49.57 | C23.2 87.92,46.77 U13.2 v84.36,46.77
  Top 0.508: J10.5 83.86,42.17 v83.86,40.93
  pour Bottom (isolate 0.305): 81.32,51.85 90.46,51.85 90.46,36.87 81.32,36.87
  pour Top (isolate 0.305): 81.32,51.85 90.46,51.85 90.46,36.87 81.32,36.87
GND9  (via drill 0.6)
  Top 0.406: M23.2 49.5,75.29 R68.1 | M24.2 49.5,78.59 R64.1 | M22.2 49.38,71.98 R72.1 | M21.2 49.5,68.68 R76.1
  Top 0.813: M23.2 51.53,75.29 52.11,74.71 v52.61,74.71 | M24.2 51.53,78.59 52.11,78.01 v52.61,78.01 | M22.2 51.53,71.98 52.11,71.41 v52.61,71.41 | M21.2 51.53,68.68 52.11,68.11 v52.61,68.11
  pour Bottom (isolate 0.61, rank 2): 30.52,90.46 59.98,90.46 59.98,61 30.52,61
I2C0_SCL
  Top 0.254: U1.11 30.45,5.94 R6.1 30.52,4.35 30.17,4 U2.3
I2C0_SDA  (via drill 0.38)
  Top 0.254: v26.45,5.88 26.45,4.35 26.8,4 U2.2 28.15,3.34 31.02,3.34 31.28,3.59 R7.1 | U1.10 29.65,8.82 v29.75,8.93
  Bottom 0.254: v26.45,5.88 26.71,5.88 v29.75,8.93
I2C1_SCL
  Top 0.254: U1.29 25.65,20.06 25.94,20.36 25.94,21.88 | 25.37,22.2 R5.1 25.44,22.39 25.94,21.88 | U3.5 32.33,21.88 25.94,21.88
I2C1_SDA  (via drill 0.38)
  Top 0.254: U1.28 26.45,20.1 27.72,21.37 31.02,21.37 31.53,20.86 R8.1 32.29,20.86 32.8,21.37 33.31,21.37 34.33,22.39 34.33,23.4 34.83,23.91 35.85,23.91 36.36,23.4 43.22,23.4 44.49,22.13 v44.49,20.36
  Bottom 0.254: v44.49,20.36 43.96,20.88 J102.4
N$1
  Top 1.016: M9.3 53.88,39.15 LEDS_OUT.1
N$2
  Top 0.813: M8.3 50.84,22.64 LEDS_L.5
N$3
  Top 0.813: M7.3 52.11,18.83 LEDS_L.4
N$4
  Top 0.813: M6.3 50.92,15.78 LEDS_L.3
N$5
  Top 0.813: M5.3 52.44,13.24 LEDS_L.2
N$6
  Top 1.016: M10.3 54.65,42.45 LEDS_OUT.2
N$7
  Bottom 0.254: BT100.21 18.2,16.25 R100.1
N$8  (via drill 0.38)
  Top 0.457: LED1.K 13.12,12.61 v14.01,13.5
  Bottom 0.254: v14.01,13.5 15.02,13.5 16.46,14.93 R100.2
N$9
  Top 0.457: LED2.K 16.88,10.36 R3.2
N$10
  Top 0.508: U4.4 35.66,10.13 C9.1
N$11
  Top 0.254: J100.2 J100.3 8.93,6.13 R1.2
N$12
  Top 0.254: U1.34 18.13,17.5 PDI100.1
N$13  (via drill 0.38)
  Top 0.254: U1.35 17.66,16.7 16.04,18.32 v14.77,18.32 | PDI100.5 12.23,18.32 v14.77,18.32 | R4.1 17.05,21.12 16.8,20.86 15.02,20.86 14.77,20.61 v14.77,18.32
  Bottom 0.254: 14.73,18.29 v14.77,18.32 13.92,17.47 SW100.B2
N$14
  Top 0.254: U1.37 17.13,15.1 16.86,14.83 XT1.2 15.28,14.64 C3.1
N$15
  Top 0.254: U1.36 17.19,15.9 16.86,16.23 XT1.1 | XT1.1 15.02,16.3 | C2.1 13.75,16.23 XT1.1
N$16
  Top 0.254: 5.88,22.9 M4.3
  Top 0.813: 5.88,22.9 4.86,21.88 2.83,21.88 LEDS_R.1
N$17
  Top 0.813: M3.3 2.49,18.32 LEDS_R.2
N$18
  Top 0.813: LEDS_R.3 M2.3
N$19
  Top 0.813: M1.3 2.49,13.24 LEDS_R.4
N$20
  Top 0.254: U1.15 37.25,11.9 SW1.B2
N$21
  Top 1.016: M11.3 54.39,45.76 LEDS_OUT.3
N$22
  Top 1.016: M12.3 53.63,49.06 LEDS_OUT.4
N$23
  Top 0.61: R13.2 U5.2
N$24
  Top 0.406: U5.15 47.53,47.79 48.04,48.3 R16.2
N$25
  Top 0.61: R9.2 U5.4
N$26
  Top 0.406: U5.13 47.79,45.25 R11.2
N$27
  Top 0.61: R18.2 U5.6
N$28
  Top 0.406: U5.11 47.03,42.71 47.66,43.34 R19.2
N$29
  Top 0.61: R22.2 U5.8
N$30
  Top 0.406: U5.9 47.03,40.17 47.53,40.68 R23.2
N$31
  Top 1.27: J3.2 85.13,76.82
  Top 1.422: J3.2 83.17,78.78 Q1.C | J3.3 85.13,74.39 85.13,76.82
N$32
  Top 1.422: NE1.P$1 R25.2
N$33
  Top 0.61: U8.3 85.13,21.12 85.89,20.36 C17.2
N$34
  Top 0.61: U8.1 86.01,18.58 C17.1
N$35
  Top 0.61: U8.4 C18.1
N$36
  Top 0.61: U8.5 85.13,23.66 86.65,25.19 C18.2
N$37
  Top 0.61: U8.6 82.33,24.93 81.7,25.56 81.7,29.25 C15.1
N$38
  Top 0.61: U8.2 82.33,19.85 81.7,19.21 81.7,17.05 C16.1
N$39
  Top 1.016: M13.3 23.4,39.15 LEDS_OUT1.1
N$40
  Top 1.016: M14.3 24.17,42.45 LEDS_OUT1.2
N$41
  Top 1.016: M15.3 23.91,45.76 LEDS_OUT1.3
N$42
  Top 1.016: M16.3 23.15,49.06 LEDS_OUT1.4
N$43
  Top 0.61: R28.2 U9.2
N$44
  Top 0.406: U9.15 17.05,47.79 17.56,48.3 R29.2
N$45
  Top 0.61: R32.2 U9.4
N$46
  Top 0.406: U9.13 17.31,45.25 R33.2
N$47
  Top 0.61: R36.2 U9.6
N$48
  Top 0.406: U9.11 16.55,42.71 17.18,43.34 R37.2
N$49
  Top 0.61: R40.2 U9.8
N$50
  Top 0.406: U9.9 16.55,40.17 17.05,40.68 R41.2
N$51
  Top 1.016: M17.3 23.4,69.63 LEDS_OUT2.1
N$52
  Top 1.016: M18.3 24.17,72.93 LEDS_OUT2.2
N$53
  Top 1.016: M19.3 23.91,76.24 LEDS_OUT2.3
N$54
  Top 1.016: M20.3 23.15,79.54 LEDS_OUT2.4
N$55
  Top 0.61: R44.2 U10.2
N$56
  Top 0.406: U10.15 17.05,78.27 17.56,78.78 R45.2
N$57
  Top 0.61: R48.2 U10.4
N$58
  Top 0.406: U10.13 17.31,75.73 R49.2
N$59
  Top 0.61: R52.2 U10.6
N$60
  Top 0.406: U10.11 16.55,73.19 17.18,73.82 R53.2
N$61
  Top 0.61: R56.2 U10.8
N$62
  Top 0.406: U10.9 16.55,70.65 17.05,71.16 R57.2
N$63
  Top 1.016: M21.3 53.88,69.63 LEDS_OUT3.1
N$64
  Top 1.016: M22.3 54.65,72.93 LEDS_OUT3.2
N$65
  Top 1.016: M23.3 54.39,76.24 LEDS_OUT3.3
N$66
  Top 1.016: M24.3 53.63,79.54 LEDS_OUT3.4
N$67
  Top 0.61: R62.2 U15.2
N$68
  Top 0.406: U15.15 47.53,78.27 48.04,78.78 R63.2
N$69
  Top 0.61: R66.2 U15.4
N$70
  Top 0.406: U15.13 47.79,75.73 R67.2
N$71
  Top 0.61: R70.2 U15.6
N$72
  Top 0.406: U15.11 47.03,73.19 47.66,73.82 R71.2
N$73
  Top 0.61: R74.2 U15.8
N$74
  Top 0.406: U15.9 47.03,70.65 47.53,71.16 R75.2
PWM_B  (via drill 0.38)
  Top 0.254: M3.1 5.39,18.07 v4.61,18.07 | U1.22 34.39,17.5 34.83,17.05 v35.6,17.05 35.85,17.31 45.48,17.31 M7.1
  Bottom 0.254: v4.61,18.07 4.35,18.32 4.35,20.1 8.16,23.91 16.8,23.91 19.34,21.37 34.58,21.37 35.6,20.36 35.6,18.32 35.85,18.07 35.85,17.31 v35.6,17.05
PWM_B1
  Top 0.406: M10.1 49.75,43.4 R20.2 49.06,42.96 48.42,42.33 R19.1
PWM_B2
  Top 0.406: M14.1 19.27,43.4 R38.2 18.58,42.96 17.94,42.33 R37.1
PWM_B3
  Top 0.406: M18.1 19.27,73.88 R54.2 18.58,73.44 17.94,72.81 R53.1
PWM_B4
  Top 0.406: M22.1 49.75,73.88 R72.2 49.06,73.44 48.42,72.81 R71.1
PWM_G  (via drill 0.38)
  Top 0.254: M2.1 5.39,14.26 v4.1,14.26 | M6.1 47.13,16.8 36.61,16.8 v36.1,16.29 35.34,16.29 35.09,16.55 34.58,16.55 34.43,16.7 U1.21
  Bottom 0.254: v4.1,14.26 3.85,14.51 3.85,20.36 7.91,24.42 17.05,24.42 19.59,21.88 34.83,21.88 36.1,20.61 36.1,18.58 36.36,18.32 36.36,16.55 v36.1,16.29
PWM_G1
  Top 0.406: R11.1 R10.2 49.5,46.71 M11.1
PWM_G2
  Top 0.406: R33.1 R34.2 19.02,46.71 M15.1
PWM_G3
  Top 0.406: R49.1 R50.2 19.02,77.19 M19.1
PWM_G4
  Top 0.406: R67.1 R68.2 49.5,77.19 M23.1
PWM_R  (via drill 0.38)
  Top 0.254: M1.1 5.39,10.45 v4.1,10.45 | U1.20 33.42,15.9 33.56,16.04 34.83,16.04 35.34,15.53 v36.61,15.53 37.37,16.29 43.57,16.29 M5.1
  Bottom 0.254: v4.1,10.45 3.34,11.21 3.34,20.61 7.66,24.93 17.31,24.93 19.85,22.39 35.09,22.39 36.61,20.86 36.61,18.83 36.87,18.58 36.87,15.78 v36.61,15.53
PWM_R1
  Top 0.406: M12.1 49.5,50.01 R15.2 R16.1
PWM_R2
  Top 0.406: M16.1 19.02,50.01 R30.2 R29.1
PWM_R3
  Top 0.406: M20.1 19.02,80.49 R46.2 R45.1
PWM_R4
  Top 0.406: M24.1 49.5,80.49 R64.2 R63.1
PWM_W  (via drill 0.38)
  Top 0.254: M4.1 8.42,21.86 7.38,21.86 v7.15,21.63 | U1.23 30.45,20.55 v30.52,20.61 | v35.09,17.82 44.23,17.82 46.26,19.85 46.26,21.9 M8.1
  Bottom 0.254: v7.15,21.63 7.15,22.13 8.42,23.4 16.55,23.4 19.09,20.86 30.52,20.86 | v35.09,17.82 35.09,20.1 34.33,20.86 30.52,20.86 | 30.52,20.86 v30.52,20.61
PWM_W1
  Top 0.406: M9.1 49.5,40.1 R24.2 49.06,39.66 R23.1
PWM_W2
  Top 0.406: M13.1 19.02,40.1 R42.2 18.58,39.66 R41.1
PWM_W3
  Top 0.406: M17.1 19.02,70.58 R58.2 18.58,70.14 R57.1
PWM_W4
  Top 0.406: M21.1 49.5,70.58 R76.2 49.06,70.14 R75.1
PWR_SENSE
  Top 0.254: C1.1 9.52,9.35 10.96,7.91 R1.1 R2.1 12.74,7.15 13.24,7.66 13.24,8.16 14.26,9.18 19.34,9.18 19.66,9.5 U1.44
R_IN
  Top 0.61: LEDS_IN.2 R13.1 R14.1
R_IN1
  Top 0.61: LEDS_IN1.2 R28.1 R27.1
R_IN2
  Top 0.61: LEDS_IN2.2 R44.1 R43.1
R_IN3
  Top 0.61: LEDS_IN3.2 R62.1 R61.1
RED_LED
  Top 0.457: U1.42 19.31,11.1 R3.1
RS232_RX
  Top 0.61: U8.13 76.74,22.39 74.08,19.72 74.08,14.26 75.86,12.48 78.39,12.48 78.78,12.1 X1.3
RS232_TX
  Top 0.61: U8.14 77.25,21.12 75.35,19.21 75.35,14.9 76.49,13.75 80.3,13.75 81.52,12.53 X1.2
SCL
  Top 0.254: U6.1 U7.3
SCL1
  Top 0.254: U11.1 U12.3
SCL2
  Top 0.254: U13.1 U14.3
SCL_N  (via drill 0.38)
  Top 0.254: U3.3 35.3,20.36 36.87,20.36 37.63,19.59 v41.95,19.59
  Bottom 0.254: v41.95,19.59 42.96,20.61 J102.3
SCL_N1  (via drill 0.38)
  Top 0.254: J4.3 65.57,44.14 R26.1 v64.04,44.49 | U6.4 67.74,46.12 v67.85,46.01
  Bottom 0.254: v67.85,46.01 65.57,46.01 v64.04,44.49
SCL_N2  (via drill 0.38)
  Top 0.254: J9.3 75.73,44.14 R59.1 v74.2,44.49 | U11.4 77.9,46.12 v78.01,46.01
  Bottom 0.254: v78.01,46.01 75.73,46.01 v74.2,44.49
SCL_N3  (via drill 0.38)
  Top 0.254: J10.3 85.89,44.14 R60.1 v84.36,44.49 | U13.4 88.06,46.12 v88.17,46.01
  Bottom 0.254: v88.17,46.01 85.89,46.01 v84.36,44.49
SCL_P  (via drill 0.38)
  Top 0.254: U3.4 35.31,22.9 39.66,22.9 v41.95,20.61
  Bottom 0.254: v41.95,20.61 41.96,20.63 J102.2
SCL_P1
  Top 0.254: J4.2 66.57,44.13 R26.2 66.93,44.91 65.71,46.12 U6.3
SCL_P2
  Top 0.254: J9.2 76.73,44.13 R59.2 77.09,44.91 75.87,46.12 U11.3
SCL_P3
  Top 0.254: J10.2 86.89,44.13 R60.2 87.25,44.91 86.03,46.12 U13.3
SDA
  Top 0.254: J4.4 64.57,42.95 63.28,44.23 63.28,48.04 63.95,48.71 U7.2
SDA1
  Top 0.254: J9.4 74.73,42.95 73.44,44.23 73.44,48.04 74.11,48.71 U12.2
SDA2
  Top 0.254: J10.4 84.89,42.95 83.6,44.23 83.6,48.04 84.27,48.71 U14.2
TTL_RX
  Top 0.61: U8.12 76.74,23.66 74.97,25.44 JP3.1
TTL_TX
  Top 0.61: U8.11 77.38,24.93 76.24,26.07 76.24,27.98 77.51,29.25 JP3.2
VAC_H  (via drill 2 pad 3.81)
  Top 1.422: v64.81,71.16 68.74,67.22 NE1.P$2
VAC_N  (via drill 2 pad 3.81)
  Top 1.422: v64.81,80.68 67.35,80.68 69.25,78.78 R25.1
W_IN
  Top 0.61: LEDS_IN.5 R22.1 R21.1
W_IN1
  Top 0.61: LEDS_IN1.5 R40.1 R39.1
W_IN2
  Top 0.61: LEDS_IN2.5 R56.1 R55.1
W_IN3
  Top 0.61: LEDS_IN3.5 R74.1 R73.1

## Text on the board
tPlace: + | > | < | -
_tPlace: Alex Mykyta | 2015-12 | Alex Mykyta | 2015-12 | Alex Mykyta | 2015-12 | Alex Mykyta | 2015-12 | Alex Mykyta | 2015-12 | + | > | < | - | Alex Mykyta | 2015-12 | U2
_bPlace: 2015-12 | Alex Mykyta | 2015-12 | Alex Mykyta | 2015-12 | Alex Mykyta | Alex Mykyta | 2015-12 | BT100
_tNames: R14 | R14 | R13 | R13 | R12 | R12 | R16 | R15 | R16 | R15 | Q1 | R9 | R10 | R9 | R10 | R8 | R11 | R8 | R11 | U1 | U1 | M4 | M4 | M3 | M3 | R1 | M2 | M2 | J1 | M1 | M1 | R6 | R7 | R6 | R7 | R3 | R3 | R4 | R5 | R4 | R5 | R2 | R2 | R1 | R1 | NE1 | R14 | R14 | R13 | R13 | R12 | R16 | R15 | R12 | R16 | R15 | R9 | R9 | R11 | R10 | R11 | R10 | R8 | U1 | R8 | U1 | C1 | C1 | C1 | M4 | M4 | U1 | U1 | U1 | U2 | C2 | U2 | C2 | U2 | C2 | M3 | M3 | R1 | R1 | R1 | M2 | M2 | R7 | M1 | R7 | M1 | J1 | J1 | J1 | R6 | R6 | R4 | R3 | R4 | R3 | R5 | R5 | R2 | R1 | R2 | R1 | JP1 | C1 | U1 | M4 | U3 | C4 | R5 | M3 | R4 | C5 | R8 | SW1 | M8 | C3 | M2 | XT1 | C2 | C7 | C8 | M7 | C3 | X1 | C4 | C5 | C2 | M1 | C1 | M6 | U4 | LED2 | LED1 | R3 | U1 | C12 | R2 | C9 | M5 | R1 | C10 | C6 | R6 | C11 | R7
_bNames: LEDS_IN | LEDS_IN | J101 | J101 | J100 | J100 | LEDS_OUT | LEDS_OUT | LEDS_IN | LEDS_IN | J101 | J101 | J100 | J100 | LEDS_OUT | LEDS_OUT | PDI100 | J102 | LEDS_L | C100 | R100 | LEDS_R | TP1 | SW100 | JP1 | TP4 | JP2 | TP3 | J100 | J101 | TP2